# EAGLE board 8s_Cell_Fixtures (EAGLE 5.12)
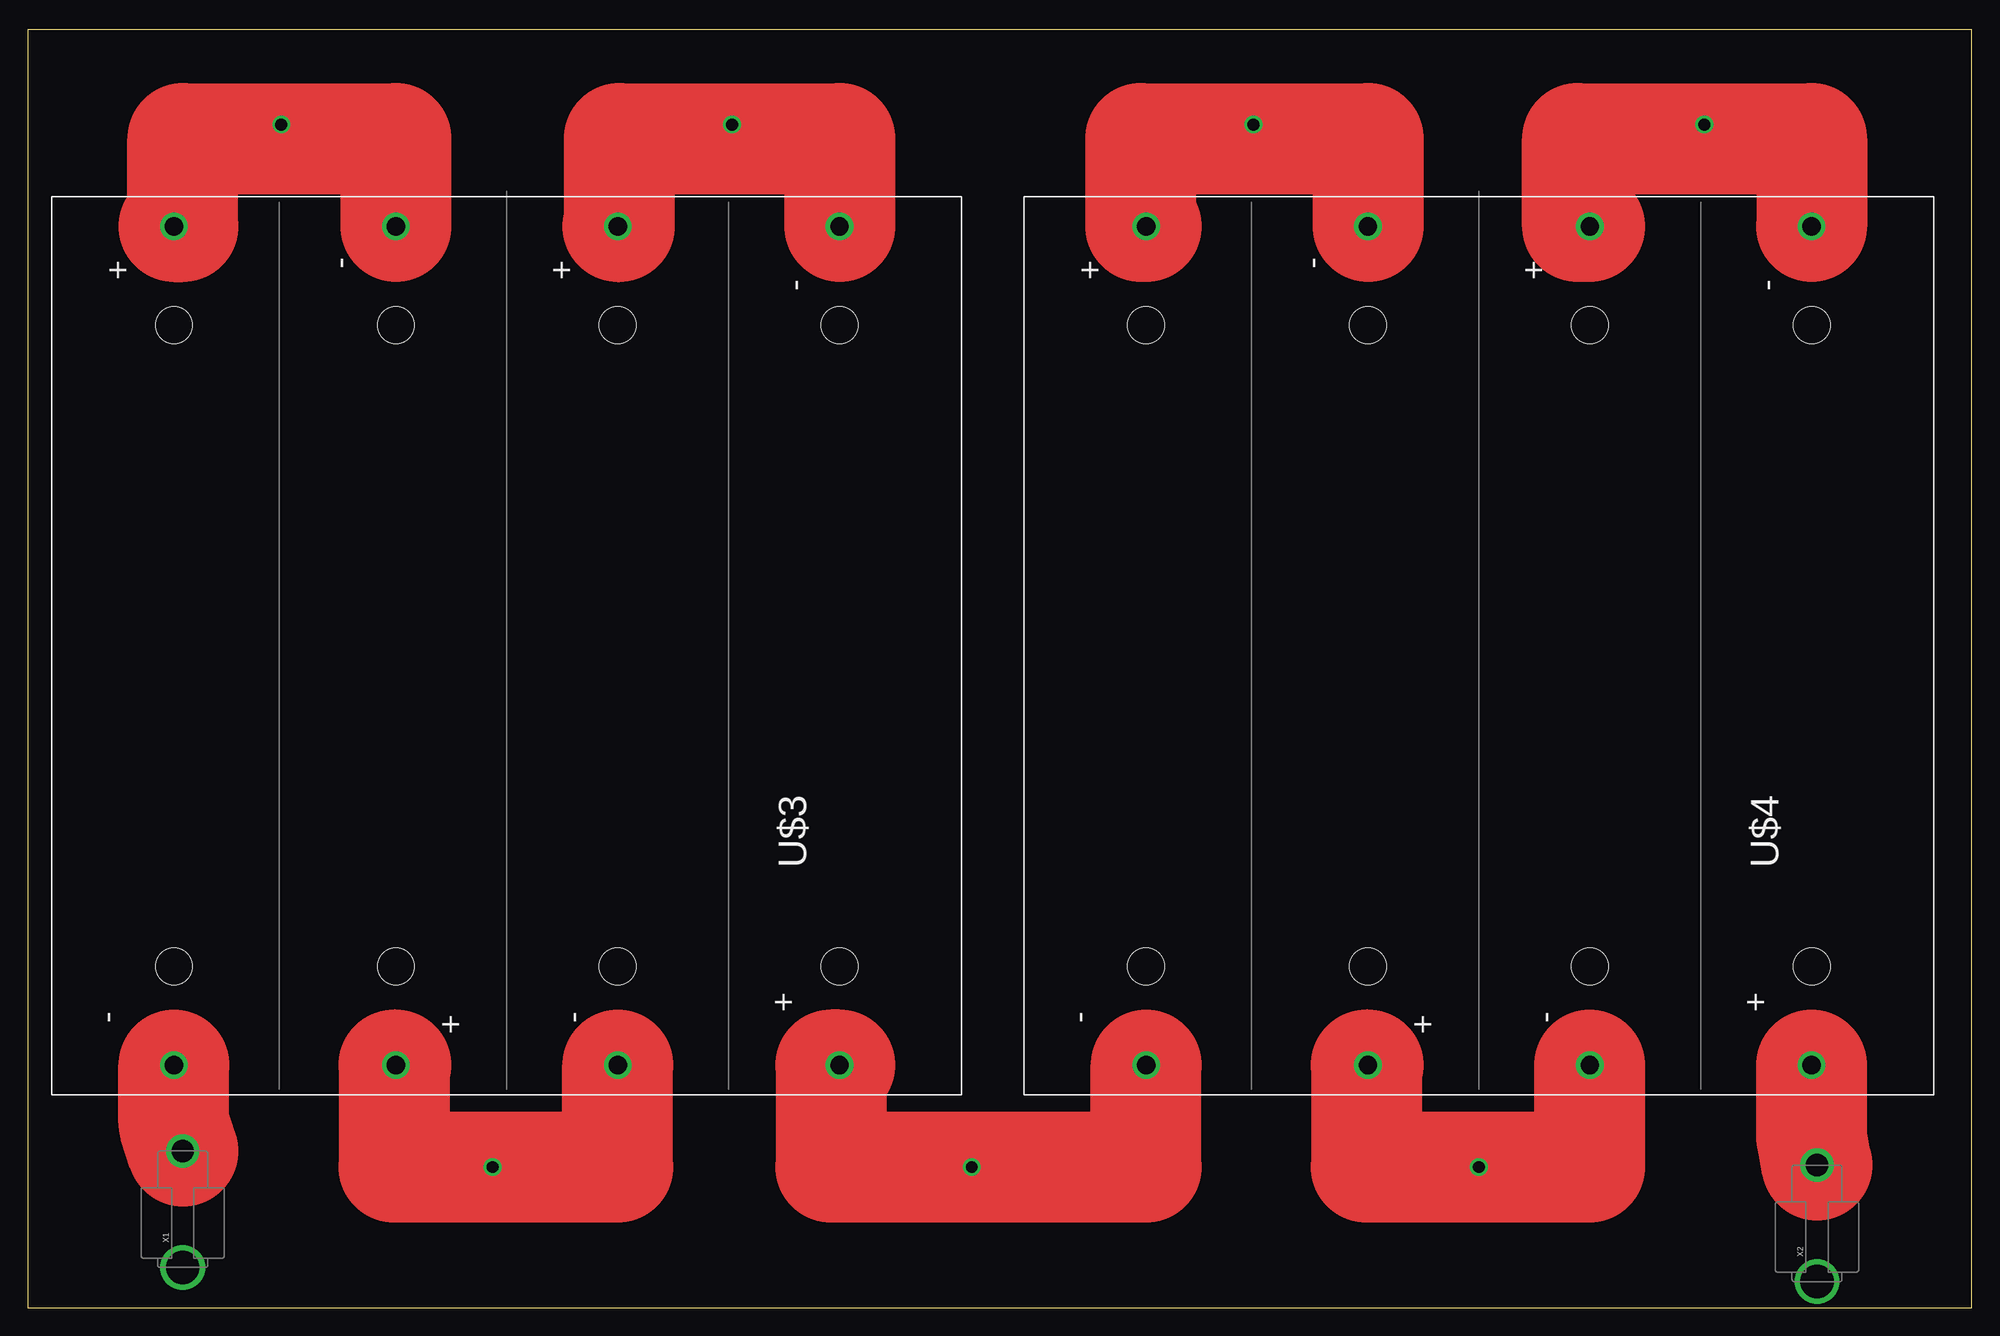
[diagram p0: board, top side]

Size 175.24 x 115.24 mm. Coordinates in mm from the lower left corner, seen from the top.
Outline: 0,0 175.24,0 175.24,115.24 0,115.24 0,0
Copper layers (1*16): Top 0.035mm / dielectric 1.5mm / Bottom 0.035mm
Design rules "default": minimum track width 10mil, minimum drill 24mil, track to track 8mil, track to pad 8mil, pad to pad 8mil, via to via 8mil, smd to smd 8mil, copper to edge 40mil, drill to drill 8mil, minimum pad ring 10mil, minimum via ring 8mil, stop-mask expansion 4mil, vias tented up to drill 0mil, thermal gap 10mil

## Footprints (pad centres in the part's own frame; a part is rotated, then mirrored left to right if it is on the bottom)
18650-4BATT = drill 1.66 round: BATT+1 37.8,30; BATT+2 -37.8,10; BATT+3 37.8,-10; BATT+4 -37.8,-30; BATT-1 -37.8,30; BATT-2 37.8,10; BATT-3 -37.8,-10; BATT-4 37.8,-30 | hole 3.3: -28.9,30; -28.9,10; -28.9,-10; -28.9,-30; 28.9,-30; 28.9,-10; 28.9,10; 28.9,30
FASTON_1217107-1 = drill 2 round: 1 5.25,0 | drill 3 round: 3 -5.25,0

## Placement (x,y rotation side)
U$3  18-650_4BATTHOLDER  [18650-4BATT]  43.18,59.69 90 top
U$4  18-650_4BATTHOLDER  [18650-4BATT]  130.81,59.69 90 top
X1  [FASTON_1217107-1]  13.97,8.89 90 top
X2  [FASTON_1217107-1]  161.29,7.62 90 top

## Library data of the parts
U$3 U$4 = MPD; PARTNO: BK-18650-PC8
X1 X2 = TE-Aaron; PARTNO: 1217107-1

## Nets
N$1: U$3.BATT+2 U$3.BATT-3
N$2: U$3.BATT+3 U$3.BATT-4
N$3: U$3.BATT+4 U$4.BATT-1
N$4: U$3.BATT+1 U$3.BATT-2
N$5: U$4.BATT+1 U$4.BATT-2
N$6: U$4.BATT+2 U$4.BATT-3
N$7: U$4.BATT+3 U$4.BATT-4
N$8: U$3.BATT-1 X1.1
N$9: U$4.BATT+4 X2.1

## Tracks (layer width: path | path; a pad name or v marks a point on that pad's centre or on a via)
N$1  (via drill 1.07)
  Top 10: U$3.BATT+2 33.02,21.89 33.02,12.7 v41.91,12.7 53.18,12.7 U$3.BATT-3
N$2
  Top 10: U$3.BATT+3 53.34,97.49 53.34,105.41 73.18,105.41 U$3.BATT-4
N$3  (via drill 1.07)
  Top 10: U$3.BATT+4 72.39,21.89 72.39,12.7 v85.09,12.7 100.81,12.7 U$4.BATT-1
N$4
  Top 10: U$3.BATT+1 13.97,97.49 13.97,105.41 33.18,105.41 U$3.BATT-2
N$5
  Top 10: U$4.BATT+1 100.33,97.49 100.33,105.41 120.81,105.41 U$4.BATT-2
N$6  (via drill 1.07)
  Top 10: U$4.BATT+2 120.65,21.89 120.65,12.7 v130.81,12.7 140.81,12.7 U$4.BATT-3
N$7
  Top 10: U$4.BATT+3 139.7,97.49 139.7,105.41 160.81,105.41 U$4.BATT-4
N$8
  Top 10: X1.1 13.18,16.68 U$3.BATT-1
N$9
  Top 10: X2.1 160.81,15.41 U$4.BATT+4
N$10  (via drill 1.07)
  other vias: 22.86,106.68
N$11  (via drill 1.07)
  other vias: 63.5,106.68
N$12  (via drill 1.07)
  other vias: 110.49,106.68
N$13  (via drill 1.07)
  other vias: 151.13,106.68